# Altium PCB usb-can.PcbDoc
Units mm, origin at the board's own origin, x right, y up, seen from the top; angles counter-clockwise.
Board outline 82.66 x 56.61 mm, 2 copper layers (Top Layer, Bottom Layer); 80 components, 96 nets, 328 pads, 48 vias.
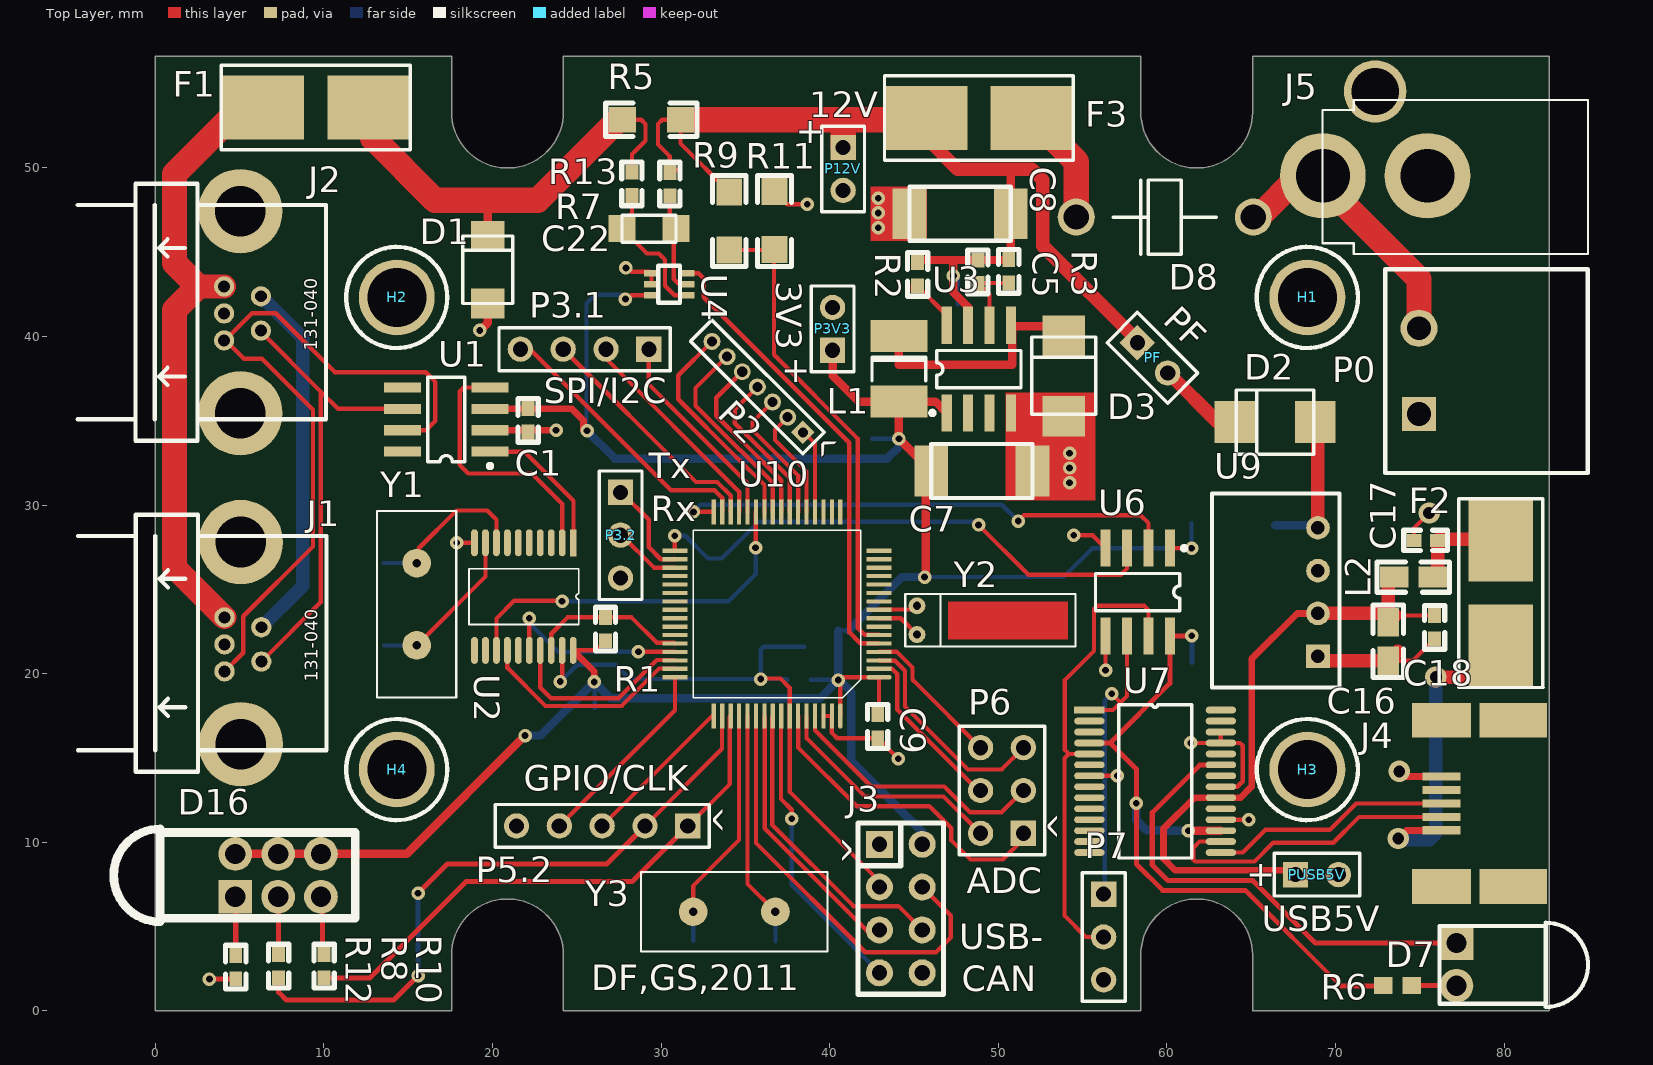
[diagram p0: Top Layer view]
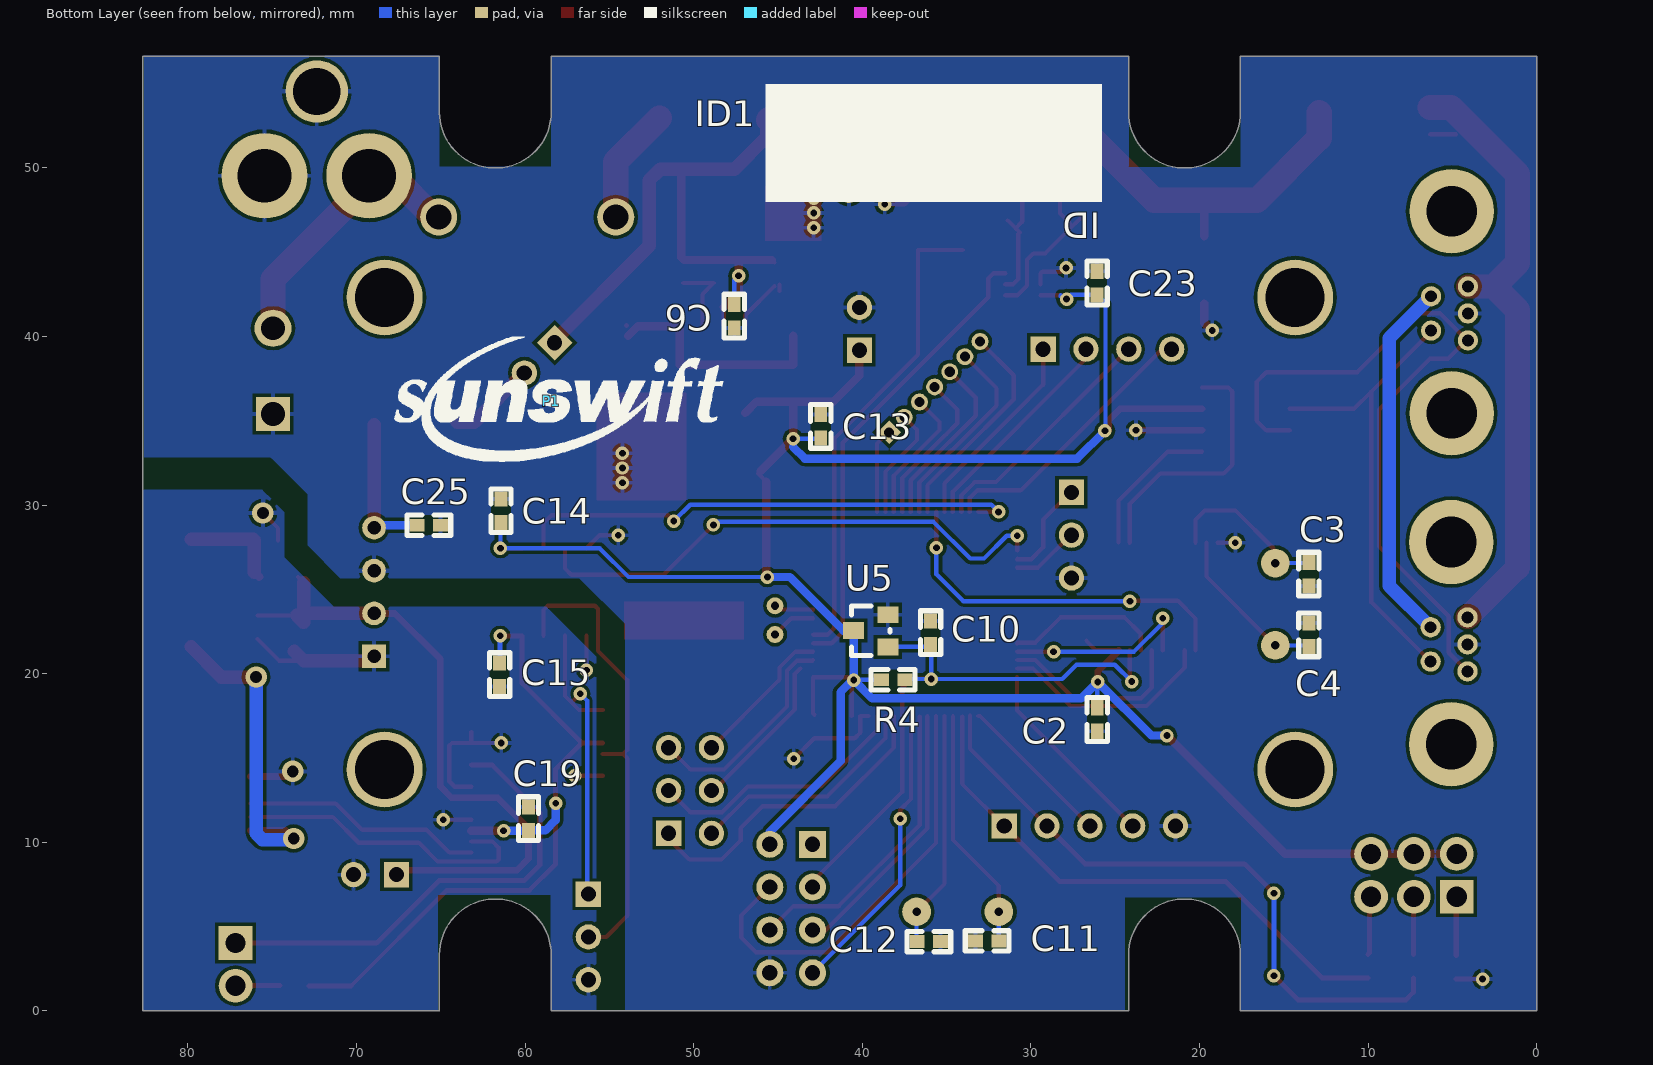
[diagram p1: Bottom Layer view, seen from below]

## Layer stack, top to bottom
Top Layer: signal copper 0.0356
Dielectric: dielectric 0.32, FR-4, Dk 4.8
Bottom Layer: signal copper 0.0356

## Board outline
17.58,0.01 17.58,3.32 cw(c20.895,3.32) 24.21,3.32 24.21,0.01 58.45,0.01 58.45,3.32 cw(c61.765,3.32) 65.08,3.32 65.08,0.01 65.085,0.005 82.66,0.005 82.66,56.615 82.655,56.61 65.08,56.61 65.08,53.3 cw(c61.765,53.3) 58.45,53.3 58.45,56.61 24.21,56.61 24.21,53.3 cw(c20.895,53.3) 17.58,53.3 17.58,56.615 0,56.615 0,0.005 0.005,0.01

## Design rules (kind name [scope] priority, off if disabled: settings)
Clearance [All] p1: gap=0.2
ComponentClearance [All] p1: gap=0.05 collisioncheckmode=3 verticalgap=0.254 showdistances=FALSE
HoleSize [All] p1: absolutevalues=TRUE maxlimit=6 minlimit=0.025 maxpercent=80.000 minpercent=20.000
HoleToHoleClearance [All] p1: gap=0.1 allowstackedmicrovias=TRUE
MinimumSolderMaskSliver [All] p1 off: minsoldermaskwidth=0.2
PolygonConnect [All] p1: connectstyle=Relief reliefconductorwidth=0.254 reliefentries=4 polygonreliefangle="90 Angle"
RoomDefinition TopLevel [InComponentClass('TopLevel')] p1 off: confinementstyle=ConfineIn formatcopy=TRUE lockcomponents=FALSE outline -67.26,-46.78 -16.46,-46.78 -16.46,-21.38 -67.26,-21.38
RoomDefinition "Unisolated CAN" [InComponentClass('Unisolated CAN')] p2 off: confinementstyle=ConfineIn formatcopy=TRUE lockcomponents=FALSE outline -67.26,-46.78 -16.46,-46.78 -16.46,-21.38 -67.26,-21.38
RoomDefinition U_USBserial [InComponentClass('U_USBserial')] p3 off: confinementstyle=ConfineIn formatcopy=TRUE lockcomponents=FALSE outline -67.26,-46.78 -16.46,-46.78 -16.46,-21.38 -67.26,-21.38
RoomDefinition U_3V-Switcher-50mA [InComponentClass('U_3V-Switcher-50mA')] p4 off: confinementstyle=ConfineIn formatcopy=TRUE lockcomponents=FALSE outline -67.26,-46.78 -16.46,-46.78 -16.46,-21.38 -67.26,-21.38
RoomDefinition MSP430 [InComponentClass('MSP430')] p5 off: confinementstyle=ConfineIn formatcopy=TRUE lockcomponents=FALSE outline -67.26,-46.78 -16.46,-46.78 -16.46,-21.38 -67.26,-21.38
RoomDefinition "5V-12V isolated" [InComponentClass('5V-12V isolated')] p6 off: confinementstyle=ConfineIn formatcopy=TRUE lockcomponents=FALSE outline -67.26,-46.78 -16.46,-46.78 -16.46,-21.38 -67.26,-21.38
RoutingVias RoutingVias_2 [(InNet('NetF2_1') OR InNet('USBGND'))] p1: holewidth=0.7 width=1.27 viastyle="Through Hole" minholewidth=0.4 minwidth=0.8 maxholewidth=0.7 maxwidth=1.27
RoutingVias RoutingVias_1 [All] p2: holewidth=0.4 width=0.8 viastyle="Through Hole" minholewidth=0.4 minwidth=0.8 maxholewidth=0.4 maxwidth=0.8
RoutingVias [All] p3 off: holewidth=0.4 width=0.8 viastyle="Through Hole" minholewidth=0.4 minwidth=0.8 maxholewidth=0.4 maxwidth=0.8
SilkToSilkClearance [All] p1 off: silktosilkclearance=0.1
SilkscreenOverComponentPads [All] p1 off: minsilkscreentomaskgap=0.254
SolderMaskExpansion [All] p1: expansion=0.102
TestPointUsage [All] p1: valid=0 allowmultiple=FALSE
Testpoint [All] p1: side=15 testpointundercomponent=TRUE minsize=1.016 maxsize=2.54 preferedsize=1.524 minholesize=0 maxholesize=1.016 preferedholesize=0.813 testpointgrid=0.025 style=1023 order=0-112345678
Width [All] p1: maxlimit=1.5 minlimit=0.2 preferedwidth=0.254 minimp=50.000000 maximp=50.000000 favimp=50.000000
18 further rules are at their usual default settings.

## Classes and differential pairs
component class "5V-12V isolated": C24 C25 C? D2 PF U9
component class MSP430: C9 C10 C11 C12 C13 J3 R4 U5 U10 Y2 Y3
component class TopLevel: C14 C15 D8 D16 F3 H1 H2 H3 H4 ID1 J5 P0 P1 P2 P3.1 P3.2 P3V3 P5.2 P6 P7 P12V P? PUSB5V R8 R9 R10 R11 R12 U6 U?
component class U_3V-Switcher-50mA: C5 C6 C7 C8 D3 L1 R2 R3 U3
component class U_USBserial: C16 C17 C18 C19 D7 F2 J4 L2 R6 U7
component class "Unisolated CAN": C1 C2 C3 C4 C22 C23 D1 F1 J1 J2 R1 R5 R7 R13 R? U1 U2 U4 Y1

## Components (designator, comment, footprint, x,y, rotation, side; value= is the part's Value field where it differs from the comment)
C1 "100nF" 0603 22.12,34.32 r90 top
C2 "100nF" 0603 26.07,17.98 r270 bottom
C3 "15pF" 0603 13.52,25.2 r90 bottom
C4 "15pF" 0603 13.52,23 r270 bottom
C5 "1n" 0603 48.79,44.53 r270 top
C6 "100nF" 0603 47.6,41.9 r270 bottom
C7 "4u7 35V" MCCT-CASEC 46.025,32.015 r0 top
C8 "4u7 35V" MCCT-CASEC 50.74,47.27 r180 top
C9 "100nF" 0603 42.85,17.57 r270 top
C10 "10nF" 0603 35.95,21.73 r90 bottom
C11 "18pF" 0603 31.9,4.15 r0 bottom
C12 "18pF" 0603 36.76,4.11 r180 bottom
C13 "100nF" 0603 42.47,33.97 r90 bottom
C14 "100nF" 0603 61.43,30.36 r270 bottom
C15 "100nF" 0603 61.51,20.64 r270 bottom
C16 "10u" 0805 73.13,20.77 r90 top
C17 "100n" 0603 76.05,27.9 r180 top
C18 "100n" 0603 75.875,23.45 r270 top
C19 "100n" 0603 59.8,10.7 r90 bottom
C22 "Cap Semi" MCCT-CASEA 29.29,46.39 r0 top
C23 "Cap Semi" 0603 26.08,43.86 r270 bottom
C25 "Cap Semi" 0603 66.41,28.8 r180 bottom
D1 "12V Transient Suppressor" SMA 19.725,43.95 r90 top
D2 "MBRS130" SMB 66.42,34.92 r180 top
D3 "MBRS130" SMB 53.88,37.66 r90 top
D7 "LED" 3mmLED 77.17,4.03 r270 top
D8 "DIODE" Diode_1N5820 65.125,47.075 r180 top
D16 "1882-2781" LED_TRILEVEL 4.755,6.77 r90 top
F1 "125mA/3A" LITTELFUSE-154 9.525,53.575 r0 top
F2 "500mA" LITTELFUSE-154 79.8,24.775 r90 top
F3 "3A" LITTELFUSE-154 48.85,52.95 r0 top
H1 "HOLE" M2.5 68.33,42.31 r0 top
H2 "HOLE" M2.5 14.33,42.31 r0 top
H3 "HOLE" M2.5 68.33,14.31 r0 top
H4 "HOLE" M2.5 14.33,14.31 r0 top
ID1 "IDBOX" IDBOX 25.79,47.98 r0 bottom
J1 "CON5-S" TRIAD5F 6.3,22.75 r90 top
J2 "CON5-S" TRIAD5F 6.275,42.375 r90 top
J3 "Tritium JTAG Connector" IDC8 42.95,9.88 r270 top
J4 "USB_MINIB" USB_MINIB 76.285,12.3 r180 top
J5 "DCSOCKET" DCSOCKET_MOD 72.35,54.525 r0 top
L1 "330uH" 1812 44.11,38.08 r270 top
L2 "FERRITE" 0805 75.76,25.73 r180 top
P0 "2way5.08header" RightAngle2way 74.95,35.4 r90 top
P1 "SUN_LOGO" SUNSWIFTLOGO 58.44,36.14 r180 bottom
P2 "GPIO" MHDR1X7 38.41,34.31 r135 top
P3.1 "SPI/I2C" HDR1X4 29.28,39.24 r180 top
P3.2 "Header 2" HDR1X3 27.6,30.75 r270 top
P3V3 "3V3" HDR1X2 40.175,39.175 r90 top
P5.2 "GPIO" HDR1X5 31.59,10.97 r180 top
P6 "ADC" HDR2X3 51.49,10.53 r90 top
P7 "Header 3" HDR1X3 56.25,6.925 r270 top
P12V "12V" HDR1X2 40.8,51.2 r270 top
PF "PF" HDR1X2 58.25,39.625 r315 top
PUSB5V "USB5V" HDR1X2 67.63,8.08 r0 top
R1 "10k" 0603 26.71,23.34 r270 top
R2 "100k" 0603 45.22,42.98 r90 top
R3 "1R" 0603 50.62,44.56 r270 top
R4 "10k" 0603 37.48,19.64 r0 bottom
R5 "" 1206 27.725,52.85 r0 top
R6 "Res Semi" 1608[0603] 73.68,1.5 r180 top
R7 "Res Semi" 0603 30.525,48.325 r90 top
R8 "1K" 0603 7.325,1.95 r90 top
R9 "100k" 1206 34.05,48.55 r270 top
R10 "1K" 0603 10.025,1.95 r90 top
R11 "20K" 1206 36.73,45.15 r90 top
R12 "1K" 0603 4.78,1.89 r90 top
R13 "Res Semi" 0603 28.275,48.35 r90 top
U1 "SN65HVD232" SO8 17.26,35.07 r90 top
U2 "MCP2515X/ST" TSSOP20 24.79,27.76 r270 top
U3 "LTC1474" SO8 48.85,38.06 r0 top
U4 "ina214" SC70-6 29.43,43.09 r270 top
U5 "XC61CN2002MR" SOT23-3 38.49,21.59 r90 bottom
U6 "IL712" SO8 58.27,24.84 r180 top
U7 "FT232R" SSOP28 55.4,17.84 r0 top
U9 "RI0512S" DIP8 68.96,21.03 r180 top
U10 "MSP430F249" QFP64 42.94,19.78 r180 top
Y1 "16MHz" HC49/4H 15.51,18.59 r90 top
Y2 "32.768 KHz" WATCHA 45.18,24.02 r270 top
Y3 "7.3728 MHz" HC49/4H 39.87,5.88 r180 top

## Footprints (in the part's own frame and the unit in brackets; to place one, negate y for a bottom-side part, rotate by r counter-clockwise, add the part's x,y. Pads: shape width x height; smd on the part's side, far side on the other; paste and mask are expansions set on the pad)
3mmLED [mm]
  round 2 hole 1.2: A(2.54,0)
  rect 2x2 hole 1.2: K(0,0)
  silkscreen extent -1.2,-1 3.8,7.8
0603 [mil]
  rect 35.43x30 smd: 1(0,0) 2(55,0)
  silkscreen extent -24,-24 79,24
0805 [mm]
  rect 1.7x1.27 smd: 1(0,0) 2(2.286,0)
  silkscreen extent -1,-0.9 3.3,0.9
1206 [mil]
  rect 62.99x60 smd: 1(0,0) 2(135,0)
  silkscreen extent -39,-39 173,39
1608[0603] [mm] "Chip Capacitor; Body 1.6 x 0.8 mm (LxW typ)"
  rect 1.1x1 smd: 1(-0.85,0) 2(0.85,0)
1812 [mm] "Chip Capacitor; Body 4.5 x 3.2 mm (LxW typ)"
  rect 1.9x3.4 smd: 1(-1.95,0) 2(1.95,0)
  silkscreen extent -0.7,-1.6 0.7,1.6
DCSOCKET_MOD [mm] "DCSOCKET with footprint adjusted relative to the pads"
  round 5.08 hole 3.2: 1(-3.1,-5) 3(3.1,-5)
  round 3.7 hole 2.8: 2(0,0)
  silkscreen extent -3.12,-9.64 12.63,-0.5
Diode_1N5820 [mm]
  round 2.2 hole 1.5: A(0,0) K(10.5,0)
  silkscreen extent 2.2,-2.2 8.3,2.2
DIP8 [mm]
  rect 1.4x1.4 hole 0.8: 1(0,0)
  round 1.4 hole 0.8: 2(0,-2.54) 3(0,-5.08) 4(0,-7.62)
  silkscreen extent -1.27,-9.65 6.28,1.85
HC49/4H [mm]
  round 1.7 hole 0.5: 1(3.085,0) 2(7.965,0)
  silkscreen extent 0,-2.35 11.05,2.35
HDR1X2 [mm] "Connector; Header; 2 Position"
  rect 1.5x1.5 hole 0.9: 1(0,0)
  round 1.5 hole 0.9: 2(2.54,0)
  silkscreen extent -1.27,-1.27 3.81,1.27
HDR1X3 [mm] "Connector; Header; 3 Position"
  rect 1.5x1.5 hole 0.9: 1(0,0)
  round 1.5 hole 0.9: 2(2.54,0) 3(5.08,0)
  silkscreen extent -1.27,-1.27 6.35,1.27
HDR1X4 [mm] "Connector; Header; 4 Position"
  rect 1.5x1.5 hole 0.9: 1(0,0)
  round 1.5 hole 0.9: 2(2.54,0) 3(5.08,0) 4(7.62,0)
  silkscreen extent -1.27,-1.27 8.89,1.27
HDR1X5 [mm] "Connector; Header; 5 Position"
  rect 1.5x1.5 hole 0.9: 1(0,0)
  round 1.5 hole 0.9: 2(2.54,0) 3(5.08,0) 4(7.62,0) 5(10.16,0)
  silkscreen extent -1.27,-1.27 11.43,1.27
HDR2X3 [mm] "Connector; Header; 3x2 Position"
  rect 1.5x1.5 hole 0.9: 1(0,0)
  round 1.5 hole 0.9: 2(0,2.54) 3(2.54,0) 4(2.54,2.54) 5(5.08,0) 6(5.08,2.54)
  silkscreen extent -1.27,-1.27 6.35,3.81
IDBOX [mm] "Infobox"
  silkscreen extent 0,-7 19.95,0
IDC8 [mm]
  rect 1.6x1.6 hole 0.9: 1(0,0)
  round 1.6 hole 0.9: 2(0,2.54) 3(2.54,0) 4(2.54,2.54) 5(5.08,0) 6(5.08,2.54) 7(7.62,0) 8(7.62,2.54)
  silkscreen extent -1.27,-1.27 8.89,3.81
LED_TRILEVEL [mm]
  rect 2x2 hole 1.2: 1(0,0)
  round 2 hole 1.2: 2(0,-2.54) 3(0,-5.08) 4(2.54,-5.08) 5(2.54,-2.54) 6(2.54,0)
  silkscreen extent -1.49,-7.11 4.03,7.21
LITTELFUSE-154 [mm]
  rect 5x3.81 smd: 1(-3.185,0) 2(3.185,0)
  silkscreen extent -5.6,-2.51 5.6,2.5
M2.5 [mm]
  round 4.5 hole 3.5: 1(0,0)
  silkscreen extent -3,-3 3,3
MCCT-CASEA [mm]
  rect 1.6x1.6 smd: 1(-1.6,0) 2(1.6,0)
  silkscreen extent -1.6,-0.8 1.6,0.8
MCCT-CASEC [mm]
  rect 2x3 smd: 1(0,0) 2(6,0)
  silkscreen extent 0,-1.6 6,1.6
MHDR1X7 [mm] "Connector; Header; 7 Position"
  rect 1x1 hole 0.6: 1(0,0)
  round 1 hole 0.6: 2(1.27,0) 3(2.54,0) 4(3.81,0) 5(5.08,0) 6(6.35,0) 7(7.62,0)
  silkscreen extent -0.9,-0.9 8.52,0.9
QFP64 [mm]
  oval 1.5x0.25 smd: 1(0.008,-0.005)
  rect 1.5x0.25 smd: 2(0.008,-0.505) 3(0.008,-1.005) 4(0.008,-1.505) 5(0.008,-2.005) 6(0.008,-2.505) 7(0.008,-3.005) 8(0.008,-3.505) 9(0.008,-4.005) 10(0.008,-4.505) 11(0.008,-5.005) 12(0.008,-5.505) 13(0.008,-6.005) 14(0.008,-6.505) 15(0.008,-7.005) 16(0.008,-7.505) 33(12.108,-7.505) 34(12.108,-7.005) 35(12.108,-6.505) 36(12.108,-6.005) 37(12.108,-5.505) 38(12.108,-5.005) 39(12.108,-4.505) 40(12.108,-4.005) 41(12.108,-3.505) 42(12.108,-3.005) 43(12.108,-2.505) 44(12.108,-2.005) 45(12.108,-1.505) 46(12.108,-1.005) 47(12.108,-0.505) 48(12.108,-0.005)
  rect 0.25x1.5 smd: 17(2.308,-9.805) 18(2.808,-9.805) 19(3.308,-9.805) 20(3.808,-9.805) 21(4.308,-9.805) 22(4.808,-9.805) 23(5.308,-9.805) 24(5.808,-9.805) 25(6.308,-9.805) 26(6.808,-9.805) 27(7.308,-9.805) 28(7.808,-9.805) 29(8.308,-9.805) 30(8.808,-9.805) 31(9.308,-9.805) 32(9.808,-9.805) 49(9.808,2.295) 50(9.308,2.295) 51(8.808,2.295) 52(8.308,2.295) 53(7.808,2.295) 54(7.308,2.295) 55(6.808,2.295) 56(6.308,2.295) 57(5.808,2.295) 58(5.308,2.295) 59(4.808,2.295) 60(4.308,2.295) 61(3.808,2.295) 62(3.308,2.295) 63(2.808,2.295)
  oval 0.25x1.5 smd: 64(2.308,2.295)
  silkscreen extent 1.09,-8.72 11.02,1.21
RightAngle2way [mm]
  rect 2x2 hole 1.4: 1(0,0)
  round 2.2 hole 1.4: 2(5.08,0)
  silkscreen extent -3.5,-10 8.58,2
SC70-6 [mm]
  rect 0.4x0.9 smd: 1(-0.65,0) 2(0,0) 3(0.65,0) 4(0.65,2.1) 5(0,2.1) 6(-0.65,2.1)
  silkscreen extent -1.1,0.4 1.1,1.7
SMA [mm]
  rect 1.8x2 smd: A(-2,0) K(2,0)
  silkscreen extent -2,-1.48 2,1.48
SMB [mm]
  rect 2.4x2.5 smd: A(-2.385,0) K(2.385,0)
  silkscreen extent -2.28,-1.9 2.3,1.9
SO8 [mm] "Small Outline; 8 Leads; Body Width 3.9 mm; Pitch 1.27 mm"
  rect 0.6x2.2 smd: 1(-1.905,-2.6) 2(-0.635,-2.6) 3(0.635,-2.6) 4(1.905,-2.6) 5(1.905,2.6) 6(0.635,2.6) 7(-0.635,2.6) 8(-1.905,2.6)
  silkscreen extent -2.88,-2.72 2.5,1.1
SOT23-3 [mm]
  rect 1x1.25 smd: 1(0,0) 2(1.905,0) 3(0.965,2.032)
  silkscreen extent -0.51,-0.13 2.41,2.16
SSOP28 [mm]
  rect 1.8x0.4 smd: 1(0,0)
  oval 1.8x0.4 smd: 2(0,-0.65) 3(0,-1.3) 4(0,-1.95) 5(0,-2.6) 6(0,-3.25) 7(0,-3.9) 8(0,-4.55) 9(0,-5.2) 10(0,-5.85) 11(0,-6.5) 12(0,-7.15) 13(0,-7.8) 14(0,-8.45) 15(7.8,-8.45) 16(7.8,-7.8) 17(7.8,-7.15) 18(7.8,-6.5) 19(7.8,-5.85) 20(7.8,-5.2) 21(7.8,-4.55) 22(7.8,-3.9) 23(7.8,-3.25) 24(7.8,-2.6) 25(7.8,-1.95) 26(7.8,-1.3) 27(7.8,-0.65) 28(7.8,0)
  silkscreen extent 1.73,-8.78 6.07,0.33
SUNSWIFTLOGO [mm] "Sunswift Logo"
  silkscreen extent -9.32,-3.58 10.19,3.81
TRIAD5F [mm]
  round 5 hole 3: 0(-6.934,1.219) 0(5.055,1.219)
  round 1.2 hole 0.7: 1(0,0) 2(0.584,2.184) 3(-1.016,2.184) 4(-2.616,2.184) 5(-2.032,0)
  silkscreen extent -8.56,-3.86 6.68,10.87
TSSOP20 [mm]
  rect 1.6x0.4 smd: 1(0,0)
  oval 1.6x0.4 smd: 2(0,-0.65) 3(0,-1.3) 4(0,-1.95) 5(0,-2.6) 6(0,-3.25) 7(0,-3.9) 8(0,-4.55) 9(0,-5.2) 10(0,-5.85) 11(6.38,-5.85) 12(6.38,-5.2) 13(6.38,-4.55) 14(6.38,-3.9) 15(6.38,-3.25) 16(6.38,-2.6) 17(6.38,-1.95) 18(6.38,-1.3) 19(6.38,-0.65) 20(6.38,0)
  silkscreen extent 1.53,-6.18 4.85,0.33
USB_MINIB [mm] "USB Mini B connector SMT"
  rect 2.25x0.5 smd mask+0: 1(0,1.6) 2(0,0.8) 3(0,0) 4(0,-0.8) 5(0,-1.6)
  rect 1.2x6.4 on Top Overlay mask+0: 2(-7.052,0)
  rect 4x2.05 smd mask+0: 7(-4.25,4.925) 9(-4.25,-4.925)
  rect 3.5x2.05 smd mask+0: 8(0,4.925) 10(0,-4.925)
WATCHA [mm]
  round 1 hole 0.5: 1(0,0) 2(1.7,0)
  Top Layer region: -0.25,1.85 2,1.85 2,8.95 -0.25,8.95
  silkscreen extent -0.7,-0.7 2.4,9.4

## Part data
C1 C2 C3 C4 C5 C6 C9 C10 C11 C12 C13 C14 C15 C16 C17 C18 C19: library part CAP, "Capacitor"
C7 C8: library part "Cap Pol3", "Polarized Capacitor (Surface Mount)"
C22 C23 C25: "Capacitor (Semiconductor SIM Model)"
D1: library part DIODE, "Diode"
D2 D3: library part "D SCHOTTKY", "Schottky Diode"
D8: "Diode"
D16: library part LED-TRILEVEL, "Three level LED"
F1 F2 F3: library part FUSE2, "Fuse"
H1 H2 H3 H4: "Hole"
J1 J2: "Connector, 2 pin, with shield @ S"
J3: library part 430F_JTAG_TRITIUM, "Tritium JTAG interface for MSP430"
J4: library part USB_miniB_SMT, "USB Mini B Connector"
L1: library part Inductor, "Inductor"
L2: library part INDUCTOR, "Inductor"
P2: library part MHDR1X7, "Header, 7-Pin"
P3.1: library part "Header 4", "Header, 4-Pin"
P3.2: library part "Header 3", "Header, 3-Pin"
P3V3 P12V PF PUSB5V: library part "Header 2", "Header, 2-Pin"
P5.2: library part "Header 5", "Header, 5-Pin"
P6: library part "Header 3X2", "Header, 3-Pin, Dual row"
P7: "Header, 3-Pin"
R1 R9 R11: library part RES1
R2 R3 R4 R8 R10 R12: library part RES1, "Resistor"
R5: library part Res3, "Resistor"
R6 R7 R13: "Semiconductor Resistor"
U1: "3.3V CAN Transciever"
U2: library part MCP2510X/ST, "MCP2510 CAN Controller"
U3: "Step-down converter"
U4: library part INA214, "Current Shunt Monitor"
U5: library part XC61F, "SOT23 reset generator"
U6: "IL712 Optical Isolator"
U7: "USB UART IC"
U9: "5V-12V isolated"
Y1 Y2 Y3: library part CRYSTAL, "Crystal"

## Via types
v1: diameter 0.8, hole 0.4, Top Layer to Bottom Layer, 44 vias
v2: diameter 1.27, hole 0.7, Top Layer to Bottom Layer, 4 vias

## Nets (pads, with @x,y where several pads share a name; then routed paths per layer and width w, separated by ;. In a path a pad name is that pad's centre, name@x,y a point inside that pad or via, vN(x,y) a via of type N, cw(c..) or ccw(c..) an arc to the next point about the centre after c; other vN are vias at no path point)
3V3: C1.2 C2.1 C7.1 C9.1 C13.1 C14.2 C23.2 D16.4 D16.5 D16.6 J3.2 L1.2 P3V3.1 R1.2 R4.2 U1.3 U2.20 U3.1 U4.3 U5.3 U6.1 U10.1 U10.64 | length 158.4
  Top Layer w0.254: U2.20 26.147,21.38 R1.2 ; v1(27.89,42.21) 28.07,42.21 28.23,42.37 28.23,42.44 28.227,42.443 U4.3@29.427,42.443 ; U10.64 40.632,19.502 v1(40.512,19.622) 40.592,19.622 40.755,19.785 U10.1 42.932,17.652 C9.1 ; L1.2@42.65,36.13 L1.2 ; v1(45.63,25.73) v1@45.69,25.79 ; C7.1@45.69,31.373 C7.1@46.179,31.861 ; U6.1 v1(61.46,27.44) ; C1.2@22.155,35.705 22.16,35.7 22.16,35.705 C1.2@22.155,35.705
  Top Layer w0.4: U1.3 C1.2@22.155,35.705 ; C1.2@22.16,35.705 24.715,35.705 25.4,35.02 25.4,34.41 25.41,34.4 v1(25.613,34.4) ; U2.20 26.04,20.13 v1(26.04,19.51)
  Top Layer w0.5: D16.6 D16.5 D16.4 14.92,9.31 v1(21.94,16.33) ; P3V3.1@40.19,39.16 40.19,37.65 41.71,36.13 L1.2 ; v1@45.69,25.79 C7.1@45.69,31.373 ; C7.1 v1(44.11,33.93) L1.2 ; U3.1 46.275,36.13 L1.2
  Bottom Layer w0.254: v1@25.587,34.4 25.587,41.97 C23.2 27.637,42.463 v1(27.89,42.21) 28.07,42.21 28.23,42.37 28.23,42.44 28.227,42.443 ; C2.1 v1@26.07,19.48 ; R4.2 40.494,19.64 v1@40.522,19.668 ; U5.3 U5.3@41.125,22.555 ; C13.1@42.51,33.93 v1(44.11,33.93) 44.11,33.45 ; v1(45.63,25.73) 53.87,25.73 55.58,27.44 v1(61.46,27.44) C14.2@61.46,28.933
  Bottom Layer w0.5: v1(21.94,16.33) 22.86,16.33 v1(26.04,19.51) 26.07,19.48 27.02,18.53 39.42,18.53 v1(40.512,19.622) ; v1(25.613,34.4) 27.263,32.75 43.41,32.75 44.11,33.45 ; U5.3 40.522,19.668 41.29,18.9 41.29,14.82 45.49,10.62 J3.2 ; U5.3@41.125,22.555 44.3,25.73 v1(45.63,25.73)
12V: C5.1 C6.1 C8.1 F3.1 P12V.1 PF.1 R2.2 R3.1 R5.2 R7.2 R9.1 U3.7 | length 67.2
  Top Layer w0.254: R7.2 30.525,50.675 29.825,51.375 29.825,52.6 30.075,52.85 R5.2 31.154,51.446 R9.1 ; R7.2@30.738,50.029 30.92,49.847 ; R2.2 R2.2@45.373,44.53 ; F3.1@45.565,52.85 F3.1 F3.1@45.665,52.345 ; U3.7@48.215,41.252 U3.7 U3.7@48.215,41.735 ; R3.1@50.59,44.53 R3.1@50.74,44.68 ; C8.1@50.74,46.04 C8.1 C8.1@50.74,47.51
  Top Layer w0.5: R2.2@45.373,44.53 47.34,44.53 ; U3.7@48.215,41.735 47.34,42.61 v1(47.34,43.6) 47.34,44.53 ; R3.1@50.59,44.53 C5.1 47.34,44.53 ; R3.1@50.74,44.68 C8.1 50.74,49.89
  Top Layer w0.8: F3.1 45.665,51.835 47.6,49.9 52,49.9 52.65,49.25 52.65,45.36 PF.1@58.293,39.718
  Top Layer w1.5: R5.2 40.8,52.85 ; P12V.1 40.8,52.85 ; F3.1@45.565,52.85 40.8,52.85
  Bottom Layer w0.254: v1(47.34,43.6) 47.6,43.34 C6.1
"12V MEASURE": R9.2 R11.1 U10.6 | length 28.5
  Top Layer w0.254: R9.2 36.701,45.121 36.701,38.909 41.66,33.95 41.66,22.72 42.075,22.305 U10.6@42.912,22.305
/RESET: C10.1 J3.3 R4.1 U2.19 U5.1 U10.58 | length 36.5
  Top Layer w0.254: v1(24.03,19.53) 24.04,19.54 24.06,19.54 24.14,19.62 24.14,19.68 U2.19 ; v1(35.91,19.68) 35.94,19.71 37.08,19.71 37.632,19.158 U10.58 ; U10.58@37.64,17.477 37.64,12.98 42.95,7.67 J3.3
  Bottom Layer w0.254: v1(24.03,19.53) 25.03,20.53 27.3,20.53 28.15,19.68 v1(35.91,19.68) ; R4.1 37.44,19.68 v1(35.91,19.68) ; U5.1 36.09,21.59 35.91,21.41 v1(35.91,19.68)
ADC0: P6.1 U10.59 | length 19.2
  Top Layer w0.254: U10.59 38.132,15.618 41.608,12.142 45.908,12.142 47.22,10.83 47.22,10.11 48.35,8.98 50.27,8.98 51.49,10.2 P6.1
ADC1: P6.2 U10.60 | length 14
  Top Layer w0.254: U10.60 38.632,16.176 42.088,12.72 46.748,12.72 48.938,10.53 P6.2
ADC2: P6.3 U10.61 | length 15.7
  Top Layer w0.254: U10.61 39.132,16.648 42.47,13.31 46.8,13.31 48.33,11.78 50.2,11.78 P6.3
CAN5V: J1.1 J2.1 | length 21.7
  Bottom Layer w0.8: J2.1 8.75,39.9 8.75,25.2 J1.1
CAN_H: J1.4 J2.4 U1.7 | length 44
  Top Layer w0.254: J2.4 J2.4@4.134,39.759 ; J1.4 5.225,21.243 5.225,23.4 9.36,27.535 9.36,35.65 6.335,38.675 5.275,38.675 4.191,39.759 J2.4@4.134,39.759 ; U1.7 16.055,34.435 16.62,35 16.62,37.3 16.05,37.87 10.66,37.87 7.155,41.375 5.75,41.375 J2.4@4.134,39.759
CAN_INT: U2.13 U10.27 | length 22.1
  Top Layer w0.254: U2.13 20.24,23.27 21.29,24.32 24.11,24.32 v1(24.13,24.3) ; v1(35.61,27.47) 35.622,27.482 U10.27@35.622,29.605
  Bottom Layer w0.254: v1(24.13,24.3) 34.02,24.3 35.61,25.89 v1(35.61,27.47)
CAN_L: J1.5 J2.5 U1.6 | length 27.8
  Top Layer w0.254: J2.5 6.275,40.273 9.814,36.734 ; J1.5 9.814,24.232 9.814,36.734 ; U1.6 10.843,35.705 9.814,36.734
CANGND: C1.1 C2.2 C3.1 C4.1 C6.2 C7.2 C8.2 C9.2 C10.2 C11.2 C12.2 C13.2 C14.1 C23.1 C25.2 D1.A D3.A J1.3 J2.3 J3.8 J5.2 J5.3 P0.1 P3.2.3 P3V3.2 P5.2.5 P12V.2 R11.2 R12.1 U1.2 U2.10 U3.4 U4.1 U4.2 U5.2 U6.4 U9.3 U10.62 U10.63 | length 21.8
  Top Layer w0.254: v1(17.88,27.76) U2.10 ; v1(19.25,40.35) v1@19.275,40.35 ; v1(27.92,44.06) 28.01,44.06 28.23,43.84 U4.1@29.33,43.84 ; U4.2 U4.1 ; R11.2 37.479,47.83 v1(38.67,47.83) ; U10.62 U10.63 40.132,16.488 40.447,16.173 C9.2 v1(44.063,14.96) ; C8.2 C8.2@44.74,48.047 ; v1(54.48,28.21) 55.595,28.21 U6.4
  Top Layer w0.3: v1(3.22,1.89) R12.1
  Top Layer w0.4: U1.2 v1(23.775,34.435)
  Top Layer w0.5: v1@19.275,40.35 19.725,40.8 D1.A
  other v1: 54.23,31.32 54.23,32.195 54.23,33.07 42.89,46.445 42.89,47.32 42.89,48.195
"CURRENT SAMPLE": U4.6 U10.5 | length 27.7
  Top Layer w0.254: U4.6 32.22,43.74 32.53,43.43 32.53,42.32 41.16,33.69 41.16,22.46 41.815,21.805 U10.5@42.912,21.805
LEDRED: P5.2.1 R10.1 U10.51 | length 32.8
  Top Layer w0.254: P5.2.1 34.084,13.464 U10.51@34.084,17.437
  Top Layer w0.3: R10.1 12.73,1.95 13.52,2.74 18.45,7.67 28.29,7.67 P5.2.1
LEDYLW: P5.2.2 R8.1 U10.50 | length 38.3
  Top Layer w0.254: P5.2.2 33.622,15.542 U10.50@33.622,17.505
  Top Layer w0.3: R8.1 7.325,1.1 7.775,0.65 14.15,0.65 v1(15.59,2.09) ; v1(15.59,6.97) 17.33,8.71 26.79,8.71 P5.2.2
  Bottom Layer w0.3: v1(15.59,2.09) v1(15.59,6.97)
NetC3_2: C3.2 U2.8 Y1.2 | length 10
  Top Layer w0.254: Y1.2 15.635,26.68 15.635,27.435 17.87,29.67 19.7,29.67 20.24,29.13 U2.8
  Bottom Layer w0.254: C3.2@13.562,26.555 Y1.2
NetC4_2: C4.2 U2.9 Y1.1 | length 9.7
  Top Layer w0.254: Y1.1 19.59,25.755 U2.9
  Bottom Layer w0.254: C4.2@13.592,21.675 Y1.1
NetC5_2: C5.2 R3.2 U3.6 | length 4.6
  Top Layer w0.254: U3.6 49.485,42.498 48.82,43.163 R3.2
NetC17_1: C17.1 F2.2 L2.1 | length 6
  Top Layer w0.5: L2.1 L2.1@76.05,26.02
  Top Layer w0.8: L2.1@76.05,26.02 C17.1 ; C17.1@76.11,27.96 F2.2
NetC22_1: C22.1 R13.1 U4.4 | length 10
  Top Layer w0.254: C22.1@27.1,46.98 C22.1 ; C22.1@27.93,46.881 27.69,46.641 C22.1 ; R13.1 28.275,47.3 27.69,46.715 C22.1 ; U4.4 30.8,42.44 30.24,43 30.24,44.55 29.87,44.92 29.16,44.92 C22.1
NetC22_2: C22.2 R7.1 U4.5 | length 6.8
  Top Layer w0.254: R7.1 30.525,46.8 30.89,46.435 C22.2 ; C22.2@31.37,46.87 30.92,46.42 C22.2 ; U4.5 31.068,43.09 30.753,43.405 30.753,44.89 30.753,46.067 30.66,46.16 C22.2
NetC25_1: C25.1 D2.A U9.4 | length 8.7
  Top Layer w0.8: U9.4 D2.A@68.96,34.765
  Bottom Layer w0.5: C25.1 68.81,28.8 U9.4
NetD1_K: D1.K F1.2 R5.1 R13.2 | length 26.3
  Top Layer w0.254: R5.1 28.825,52.85 29.075,52.6 29.075,51.6 28.275,50.8 R13.2
  Top Layer w0.5: D1.K 19.725,48.045
  Top Layer w1.5: F1.2@12.91,53.275 12.91,51.755 16.595,48.07 19.75,48.07 ; 19.785,48.075 22.7,48.075 R5.1@27.475,52.85
NetD2_K: D2.K PF.2 | length 5.2
  Top Layer w0.8: PF.2@60.075,37.85 63.005,34.92 D2.K
NetD3_K: D3.K L1.1 U3.5 | length 14
  Top Layer w0.254: D3.K@53.975,40.66 D3.K@54,40.635
  Top Layer w0.5: L1.1 44.11,38.33 50.82,38.33 50.82,40.595 53.33,40.595 D3.K
NetD7_A: D7.A R6.1 | length 2.6
  Top Layer w0.3: R6.1 D7.A@77.17,1.5
NetD7_K: D7.K U7.23 | length 28.3
  Top Layer w0.254: U7.23@63.185,14.575 U7.23
  Top Layer w0.3: U7.23@63.185,14.575 61.95,14.575 59.132,11.757 59.132,8.658 60.065,7.725 65.105,7.725 68.8,4.03 D7.K@77.175,4.03
NetD8_A: D8.A J5.1 P0.2 | length 16.3
  Top Layer w1.5: D8.A 65.425,47.075 67.875,49.525 68.825,49.525 69.037,49.313 74.95,43.4 P0.2
NetD8_K: D8.K F3.2 | length 6.9
  Top Layer w1.5: F3.2 54.625,50.36 D8.K
NetD16_1: D16.1 R12.2 | length 3.5
  Top Layer w0.3: D16.1 4.78,6.745 R12.2
NetD16_2: D16.2 R8.2 | length 3.4
  Top Layer w0.3: D16.2 7.325,6.74 R8.2
NetD16_3: D16.3 R10.2 | length 3.9
  Top Layer w0.254: D16.3 D16.3@10.095,6.51
  Top Layer w0.3: D16.3 9.928,6.677 9.928,3.444 R10.2
NetF1_1: F1.1 J1.2 J2.2 | length 38.6
  Top Layer w0.254: F1.1@4.8,51.98 F1.1@6.315,51.98
  Top Layer w1.4: 1.15,26.3 J1.2 ; 2.541,42.959 J2.2
  Top Layer w1.5: 1.15,26.3 1.15,41.568 2.541,42.959 1.15,44.35 1.15,49.625 5.1,53.575 F1.1
NetF2_1: F2.1 J4.1 | length 19.1
  Top Layer w0.4: v2(73.725,10.225) 74.2,10.7 J4.1
  Top Layer w0.7: v2(73.725,10.225) v2@73.725,10.275
  Top Layer w0.8: v2(75.95,19.8) 78.01,19.8 F2.1
  Bottom Layer w0.8: v2(73.725,10.225) 73.725,10.175 73.75,10.15 75.575,10.15 75.95,10.525 v2(75.95,19.8)
NetJ4_2: J4.2@76.285,11.5 U7.16 | length 18.3
  Top Layer w0.254: U7.16 61.94,10.04 61.57,9.67 61.57,8.97 61.677,8.863 65.193,8.863 66.3,9.97 69.87,9.97 71.4,11.5 J4.2@76.285,11.5
NetJ4_3: J4.3 U7.15 | length 14.3
  Top Layer w0.254: U7.15 64.5,9.39 65.85,10.74 69.665,10.74 71.225,12.3 J4.3
NetP7_1: P7.1 U6.6 U7.1 | length 19
  Top Layer w0.254: U7.1 56.8,17.84 57.244,18.284 ; v1(56.725,18.804) 57.244,18.284 ; U6.6 57.635,18.675 57.244,18.284
  Bottom Layer w0.254: P7.1 56.323,6.998 56.323,18.402 v1(56.725,18.804)
NetP7_2: P7.2 U6.7 U7.5 | length 28.1
  Top Layer w0.254: U7.5 54.18,15.24 ; P7.2 55.19,4.385 53.925,5.65 53.925,14.985 54.18,15.24 ; U6.7 58.905,23.775 58.65,24.03 55.87,24.03 55.68,23.84 55.68,21.35 53.95,19.62 53.95,15.47 54.18,15.24
NetR2_1: R2.1 U3.8 | length 3.4
  Top Layer w0.254: R2.1@44.92,42.685 R2.1@44.92,43.07 ; R2.1 46.945,41.255 U3.8
NetU1_1: U1.1 U2.1 | length 8.6
  Top Layer w0.254: U1.1 21.895,33.165 24.81,30.25 U2.1@24.81,27.78
NetU1_4: U1.4 U2.2 | length 15.6
  Top Layer w0.254: U1.4 18.295,36.975 18.06,36.74 18.06,32.38 18.57,31.87 22.33,31.87 24.14,30.06 U2.2
NetU2_3: U2.3
P1.0: U10.12
P1.1: U10.13
P1.2: U10.14
P1.3: U10.15
P1.4: U10.16
P1.5: U10.17
P1.6: U10.18
P1.7: U10.19
P2.0: P2.1 U10.20 | length 5
  Top Layer w0.254: P2.1@38.474,34.31 39.132,33.652 U10.20
P2.1: P2.2 U10.21 | length 6.7
  Top Layer w0.254: P2.2 36.76,34.456 36.76,33.86 38.632,31.988 U10.21
P2.2: P2.3 U10.22 | length 8.1
  Top Layer w0.254: P2.3 35.43,34.922 35.43,34.45 38.132,31.748 U10.22
P2.3: P2.4 U10.23 | length 9.3
  Top Layer w0.254: P2.4 34.37,35.658 34.37,34.848 35.062,34.156 35.082,34.156 37.632,31.606 U10.23
P2.4: P2.5 U10.24 | length 10.6
  Top Layer w0.254: P2.5 33.28,36.364 33.28,35.296 34.874,33.702 34.894,33.702 37.132,31.464 U10.24
P2.5: P2.6 U10.25 | length 11.9
  Top Layer w0.254: P2.6 32.05,36.93 32.05,35.884 34.686,33.248 34.706,33.248 36.632,31.322 U10.25
P2.6: P2.7 U10.26 | length 13.1
  Top Layer w0.254: P2.7 31.02,37.696 31.02,36.272 34.498,32.794 34.518,32.794 36.132,31.18 U10.26
P3.0: P3.1.1 U10.28 | length 12.1
  Top Layer w0.254: P3.1.1 29.28,37.14 30.92,35.5 35.132,31.288 U10.28
P3.1: P3.1.2 U10.29 | length 12.9
  Top Layer w0.254: P3.1.2 26.74,38.68 34.632,30.788 U10.29
P3.2: P3.1.3 U10.30 | length 14.6
  Top Layer w0.254: P3.1.3 32.07,31.37 33.327,31.37 34.132,30.565 U10.30 U10.30@34.086,29.631
P3.3: P3.1.4 U10.31 | length 16.5
  Top Layer w0.254: P3.1.4 22.24,39.24 30.61,30.87 33.185,30.87 33.632,30.423 U10.31
P3.4: U6.2 U10.32 | length 30.6
  Top Layer w0.254: v1(31.92,29.59) 31.935,29.605 U10.32@33.122,29.605 ; v1(51.18,29.05) 51.52,29.39 58.44,29.39 58.905,28.925 U6.2
  Bottom Layer w0.254: v1(31.92,29.59) 32.35,30.02 50.21,30.02 v1(51.18,29.05)
P3.5: U6.3 U10.33 | length 31.8
  Top Layer w0.254: U10.33@30.822,27.305 v1(30.822,28.182) ; v1(48.83,28.82) 51.79,25.86 57.26,25.86 57.635,26.235 U6.3
  Bottom Layer w0.254: v1(30.822,28.182) 31.435,28.182 32.79,26.827 33.606,26.827 35.78,29 48.65,29 v1(48.83,28.82)
P3.6: P3.2.1 U10.34 | length 5.9
  Top Layer w0.254: P3.2.1 27.655,30.75 29.28,29.125 29.28,27.495 29.99,26.785 U10.34 U10.34@30.784,26.833
P3.7: P3.2.2 U10.35 | length 4
  Top Layer w0.254: P3.2.2 27.665,28.21 29.59,26.285 U10.35
P4.0: U10.36
P4.1: U10.37
P4.2: U10.38
P4.3: U10.39
P4.4: U10.40
P4.5: U10.41
P4.6: U10.42
P4.7: U10.43
P5.0: R1.1 U2.18 U10.44 | length 9.4
  Top Layer w0.254: U2.18 23.49,22.37 24.458,23.338 28.25,23.338 29.755,21.833 30.784,21.833 U10.44
P5.1: U2.16 U10.45 | length 11.5
  Top Layer w0.254: U2.16 v1(22.19,23.29) ; v1(28.662,21.305) U10.45@30.822,21.305
  Bottom Layer w0.254: v1(22.19,23.29) 22.19,23.01 23.895,21.305 v1(28.662,21.305)
P5.2: U2.17 U10.46 | length 11.4
  Top Layer w0.254: U2.17 22.84,19.18 23.482,18.538 27.478,18.538 29.745,20.805 U10.46@30.812,20.805
P5.3: U2.14 U10.47 | length 12.8
  Top Layer w0.254: U2.14 20.89,20.35 23.156,18.084 27.666,18.084 29.887,20.305 U10.47@30.822,20.305
P5.4: P5.2.4 U10.48 | length 11.7
  Top Layer w0.254: P5.2.4 30.832,17.832 U10.48
P5.5: P5.2.3 U10.49 | length 9.8
  Top Layer w0.254: P5.2.3@26.51,11.41 P5.2.3 33.025,17.485 U10.49
P6.3: P6.4 U10.2 | length 9.7
  Top Layer w0.254: 43.686,20.305 44.009,19.983 44.009,17.869 48.808,13.07 P6.4 P6.4@48.95,13.29
P6.4: P6.5 U10.3 | length 13
  Top Layer w0.254: U10.3@42.922,20.805 42.968,20.759 43.874,20.759 44.463,20.171 44.463,18.057 48.2,14.32 50.2,14.32 P6.5
P6.5: P6.6 U10.4 | length 8.8
  Top Layer w0.254: U10.4@42.922,21.305 43.97,21.305 44.917,20.359 44.917,19.643 45.15,19.41 P6.6
TCK: J3.7 U10.57 | length 17.6
  Top Layer w0.254: U10.57@37.12,17.473 37.12,12.56 37.752,11.928 v1(37.752,11.398)
  Bottom Layer w0.254: v1(37.752,11.398) 37.752,7.458 J3.7
TDI: J3.5 U10.55 | length 16.1
  Top Layer w0.254: U10.55@36.146,17.471 36.146,10.832 42.398,4.58 42.73,4.58 J3.5
TDO: J3.4 U10.54 | length 25.8
  Top Layer w0.254: U10.54 35.632,9.958 42.11,3.48 46.31,3.48 47.18,4.35 47.18,5.65 J3.4
TMS: J3.6 U10.56 | length 17.9
  Top Layer w0.254: U10.56@36.6,17.453 36.6,11.02 41.407,6.213 44.077,6.213 J3.6
USB3V3: C15.1 C19.1 R6.2 U6.8 U7.4 U7.17 | length 43.7
  Top Layer w0.254: v1@58.15,12.38 58.19,12.34 v1(58.19,12.31) ; 64.65,7.15 70.325,1.475
  Top Layer w0.3: U7.4 56.64,15.89 ; v1(58.19,12.31) 58.19,8.71 59.75,7.15 64.65,7.15 ; v1@58.19,12.34 58.19,14.34 56.64,15.89 ; v1(61.48,22.24) U6.8 60.175,19.425 56.64,15.89 ; 70.325,1.475 R6.2@72.805,1.475
  Top Layer w0.5: v1(61.28,10.69) U7.17
  Bottom Layer w0.3: C15.1@61.48,20.67 v1(61.48,22.24)
  Bottom Layer w0.5: v1(58.19,12.31) 58.19,11.31 58.8,10.7 C19.1 ; C19.1@59.81,10.69 v1(61.28,10.69)
USB5V: C16.2 C18.1 L2.2 PUSB5V.1 U7.20 U9.2 | length 39
  Top Layer w0.254: C16.2@72.616,23.57 C16.2 ; L2.2@73.13,25.386 L2.2 ; C16.2@73.55,23.45 C18.1
  Top Layer w0.4: PUSB5V.1 67.374,8.336 60.494,8.336 59.8,9.03 59.8,10.81 61.63,12.64 U7.20 64.37,12.64 65.027,13.297 65.027,20.867 67.73,23.57 U9.2
  Top Layer w0.8: U9.2 C16.2@72.616,23.57 ; L2.2@73.13,25.386 C16.2 73.156,23.056 C16.2@73.55,23.45
USBGND: C15.2 C16.1 C17.2 C18.2 C19.2 J4.5 P7.3 PUSB5V.2 U6.5 U7.7 U7.18 U7.21 U7.25 U7.26 U9.1 | length 25.7
  Top Layer w0.254: U7.7 v1(57.05,13.94) ; v1(56.365,20.205) U6.5 ; v1(61.41,15.89) U7.25 ; U7.18 v1(64.86,11.34) ; U7.21 64.17,13.29 64.5,13.62 64.5,15.72 64.33,15.89 U7.25 ; U7.26 U7.25 ; C16.1 74.592,20.77 C18.2 ; v2(73.775,14.2) v2@74.075,13.9 ; C17.2 74.653,28.628 v2(75.55,29.525)
  Top Layer w0.4: v2@74.075,13.9 J4.5
  Top Layer w0.8: U9.1 69.22,20.77 C16.1 C16.1@73.693,21.333
VEREF+: U10.10
VREF+: U10.7
VREF-/VEREF-: U10.11
XT1IN: U10.8 Y2.2 | length 2.6
  Top Layer w0.254: U10.8 44.215,23.285 Y2.2
XT1OUT: U10.9 Y2.1 | length 2.3
  Top Layer w0.254: U10.9 42.947,23.8 44.96,23.8 Y2.1
XT2IN: C12.1 U10.53 Y3.1 | length 14
  Top Layer w0.254: U10.53 35.132,7.533 Y3.1
  Bottom Layer w0.254: C12.1@36.785,4.135 Y3.1
XT2OUT: C11.1 U10.52 Y3.2 | length 14.4
  Top Layer w0.254: Y3.2 31.905,7.413 34.622,10.13 U10.52@34.622,17.475
  Bottom Layer w0.254: C11.1@31.905,4.155 Y3.2
pads on no net: H1.1 H2.1 H3.1 H4.1 J1.0 J2.0 J3.1 J4.2@83.337,12.3 J4.4 J4.7 J4.8 J4.9 J4.10 U1.5 U1.8 U2.4 U2.5 U2.6 U2.7 U2.11 U2.12 U2.15 U3.2 U3.3 U7.2 U7.3 U7.6 U7.8 U7.9 U7.10 U7.11 U7.12 U7.13 U7.14 U7.19 U7.22 U7.24 U7.27 U7.28

## Polygon pours and split planes (outlines as drawn)
USBGND on Bottom Layer "USBGND" (solid, remove dead copper, pour order 1000): 82.6,0.05 65.175,0.05 65.175,6.85 65.15,6.875 58.475,6.875 58.475,0.075 58.425,0.025 56.475,0.025 55.825,0.025 55.8,0 55.775,0.025 55.775,20.775 55.775,21 56.825,22.05 58.75,23.975 71.325,23.975 71.35,23.975 73.55,26.175 74.275,26.9 74.275,29.575 75.525,30.825 75.6,30.9 82.65,30.9 82.65,0.05 82.625,0.075 82.6,0.075
CANGND on Bottom Layer "CANGND" (solid, remove dead copper, pour order 1000): 67.475,25.65 70.95,25.65 72.9,27.6 72.9,30.075 72.9,30.625 74.95,32.675 75.1,32.825 82.6,32.825 82.6,56.625 82.575,56.65 65.1,56.65 65.1,50.075 65.075,50.05 58.45,50.05 58.45,56.575 58.425,56.6 58.4,56.625 24.2,56.625 24.2,50.075 24.225,50.05 24.2,50.025 17.575,50.025 17.575,56.6 17.525,56.65 17.5,56.625 -0.025,56.625 -0.025,0 0.025,0.05 17.525,0.05 17.525,6.725 24.45,6.725 24.45,0.025 24.475,0.05 54.075,0.05 54.075,22.95 56.775,25.65 68.275,25.65

## Other copper
Top Layer:
  region net CANGND: 45.77,48.88 42.43,48.88 42.43,45.65 45.77,45.65
  region net CANGND: 55.77,36.66 50.43,36.66 50.43,30.27 55.77,30.27

## Silkscreen, mask and mechanical layers (free items; w line width, h text height)
Top Overlay:
  text "+" at 38,51.45 h1.52
  text "+" at 37.125,37.275 h1.52
  text "SPI/I2C" at 23.04,36.02 h1.52
  text "^" at 40.04,32.01 h1.52 r45
  text "Tx" at 29.275,31.6 h1.52
  text "Rx" at 29.4,29.05 h1.52
  text "GPIO/CLK" at 21.86,13.05 h1.52
  text "^" at 34.622,10.46 h1.52 r90
  text "^" at 39.81,10.4 h1.52 r270
  text "^" at 54.46,10.06 h1.52 r90
  text "+" at 64.71,7.4 h1.52
  text "ADC" at 48.14,6.98 h1.52
  text "USB-" at 47.7,3.65 h1.52
  text "DF,GS,2011" at 25.85,1.225 h1.52
  text "CAN" at 47.825,1.175 h1.52
Mechanical 1:
  circle w0.254: c14.33,42.31 r1.602
  circle w0.254: c68.33,42.31 r1.602
  circle w0.254: c68.33,14.31 r1.602
  circle w0.254: c14.33,14.31 r1.602
  lines w0.254: 0,0.005 0,56.615 17.58,56.615 17.58,53.305 ; 0.005,0.01 17.58,0.01 17.58,3.32 cw(c20.895,3.32) 24.21,3.32 24.21,0.01 58.45,0.01 58.45,3.32 cw(c61.765,3.32) 65.08,3.32 65.08,0.01 ; 17.58,53.3 ccw(c20.895,53.3) 24.21,53.3 24.21,56.61 58.45,56.61 58.45,53.3 ccw(c61.765,53.3) 65.08,53.3 65.08,56.61 82.655,56.61 ; 65.085,0.005 82.66,0.005 82.66,56.615

## Text inside footprints (layer, text, board x,y; h text height)
ID1: Bottom Overlay "ID" at 25.89,47.33 h1.52 r180
J1: Top Overlay "131-040" at 9.653,19.524 h0.76 r90
J2: Top Overlay "131-040" at 9.628,39.149 h0.76 r90